# Altium PCB PCB_DACN3_2025-05-22.pcbdoc
Units mm, origin at the board's own origin, x right, y up, seen from the top; angles counter-clockwise.
Board outline 104.52 x 122.3 mm, 2 copper layers (Top Layer, Bottom Layer); 8 components, 29 nets, 64 pads, 0 vias.
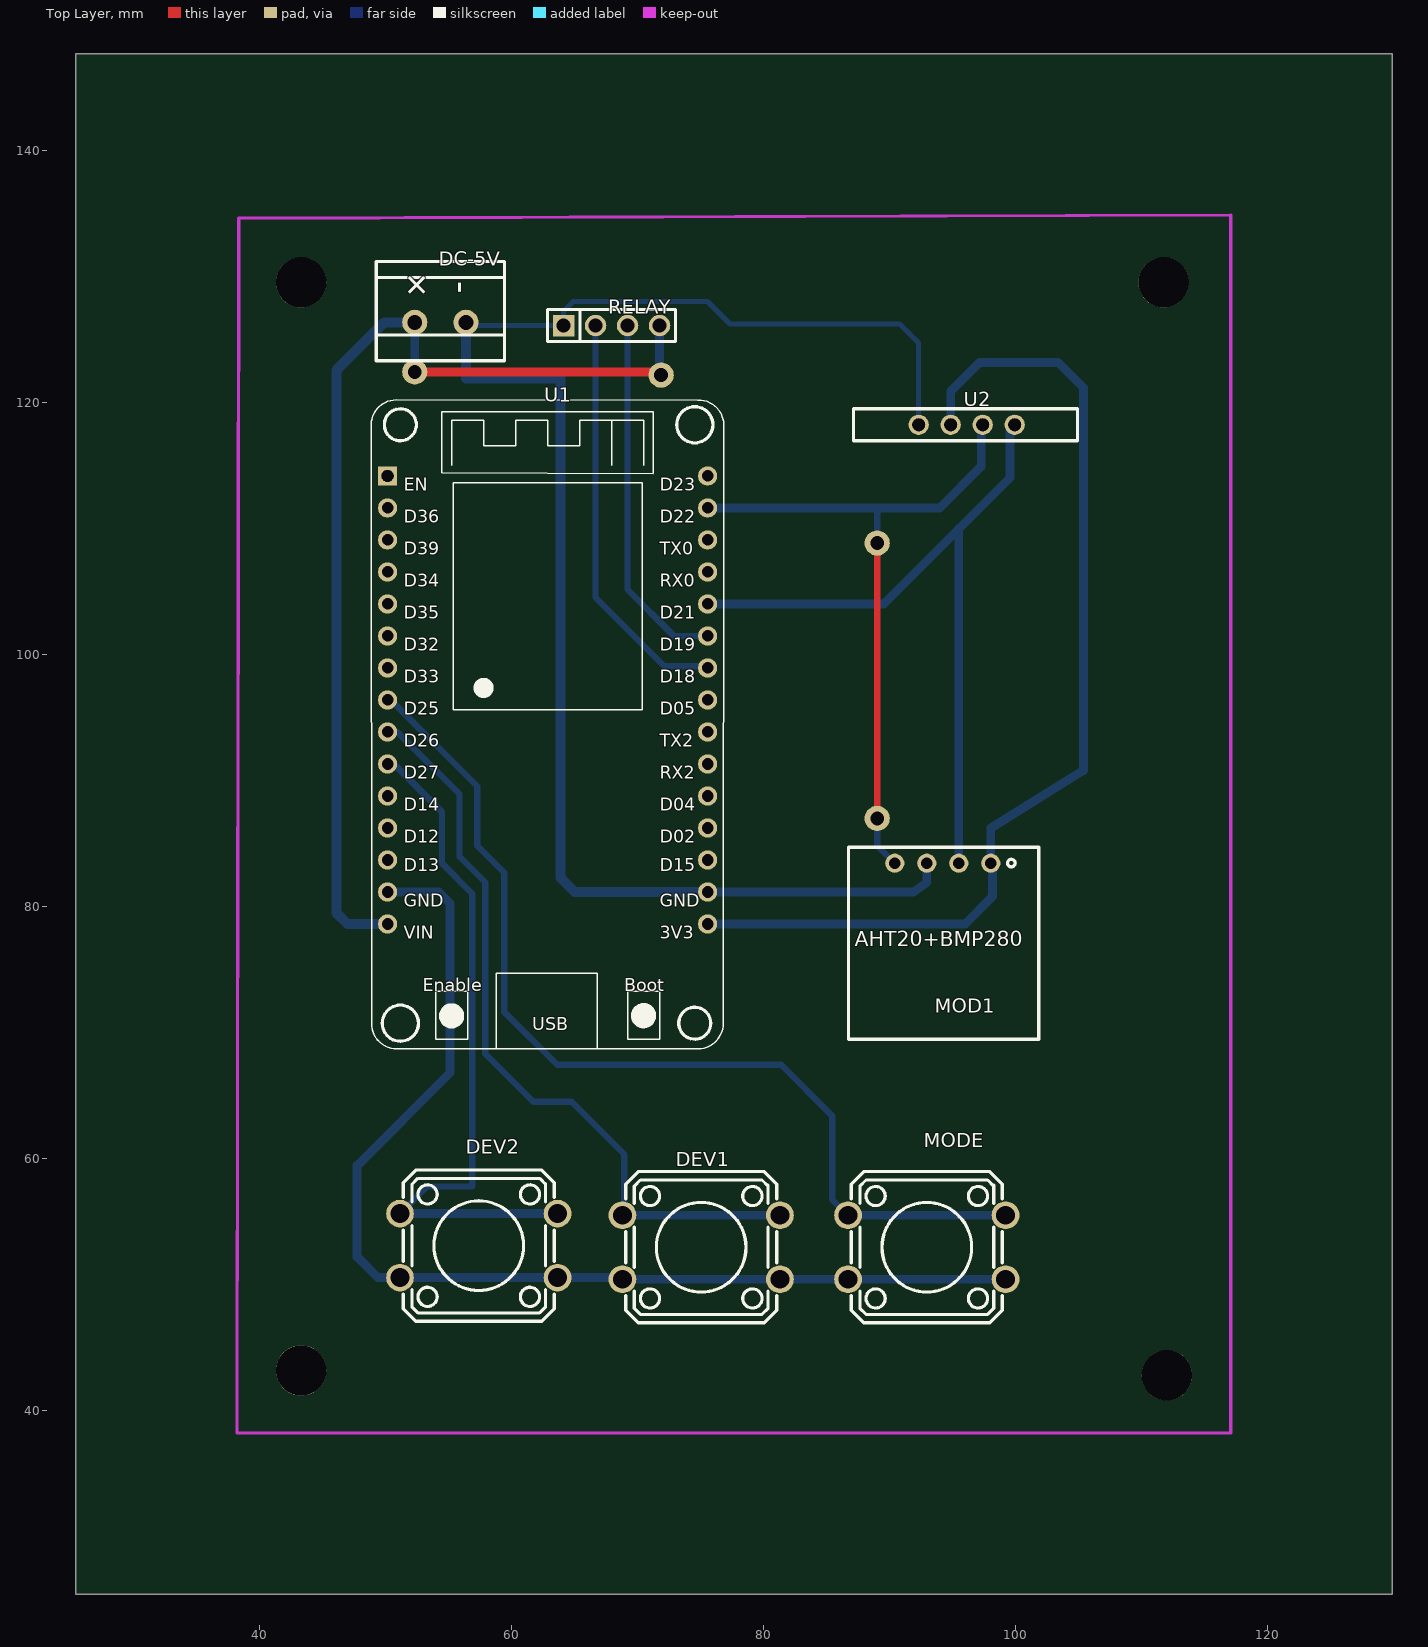
[diagram p0: Top Layer view]
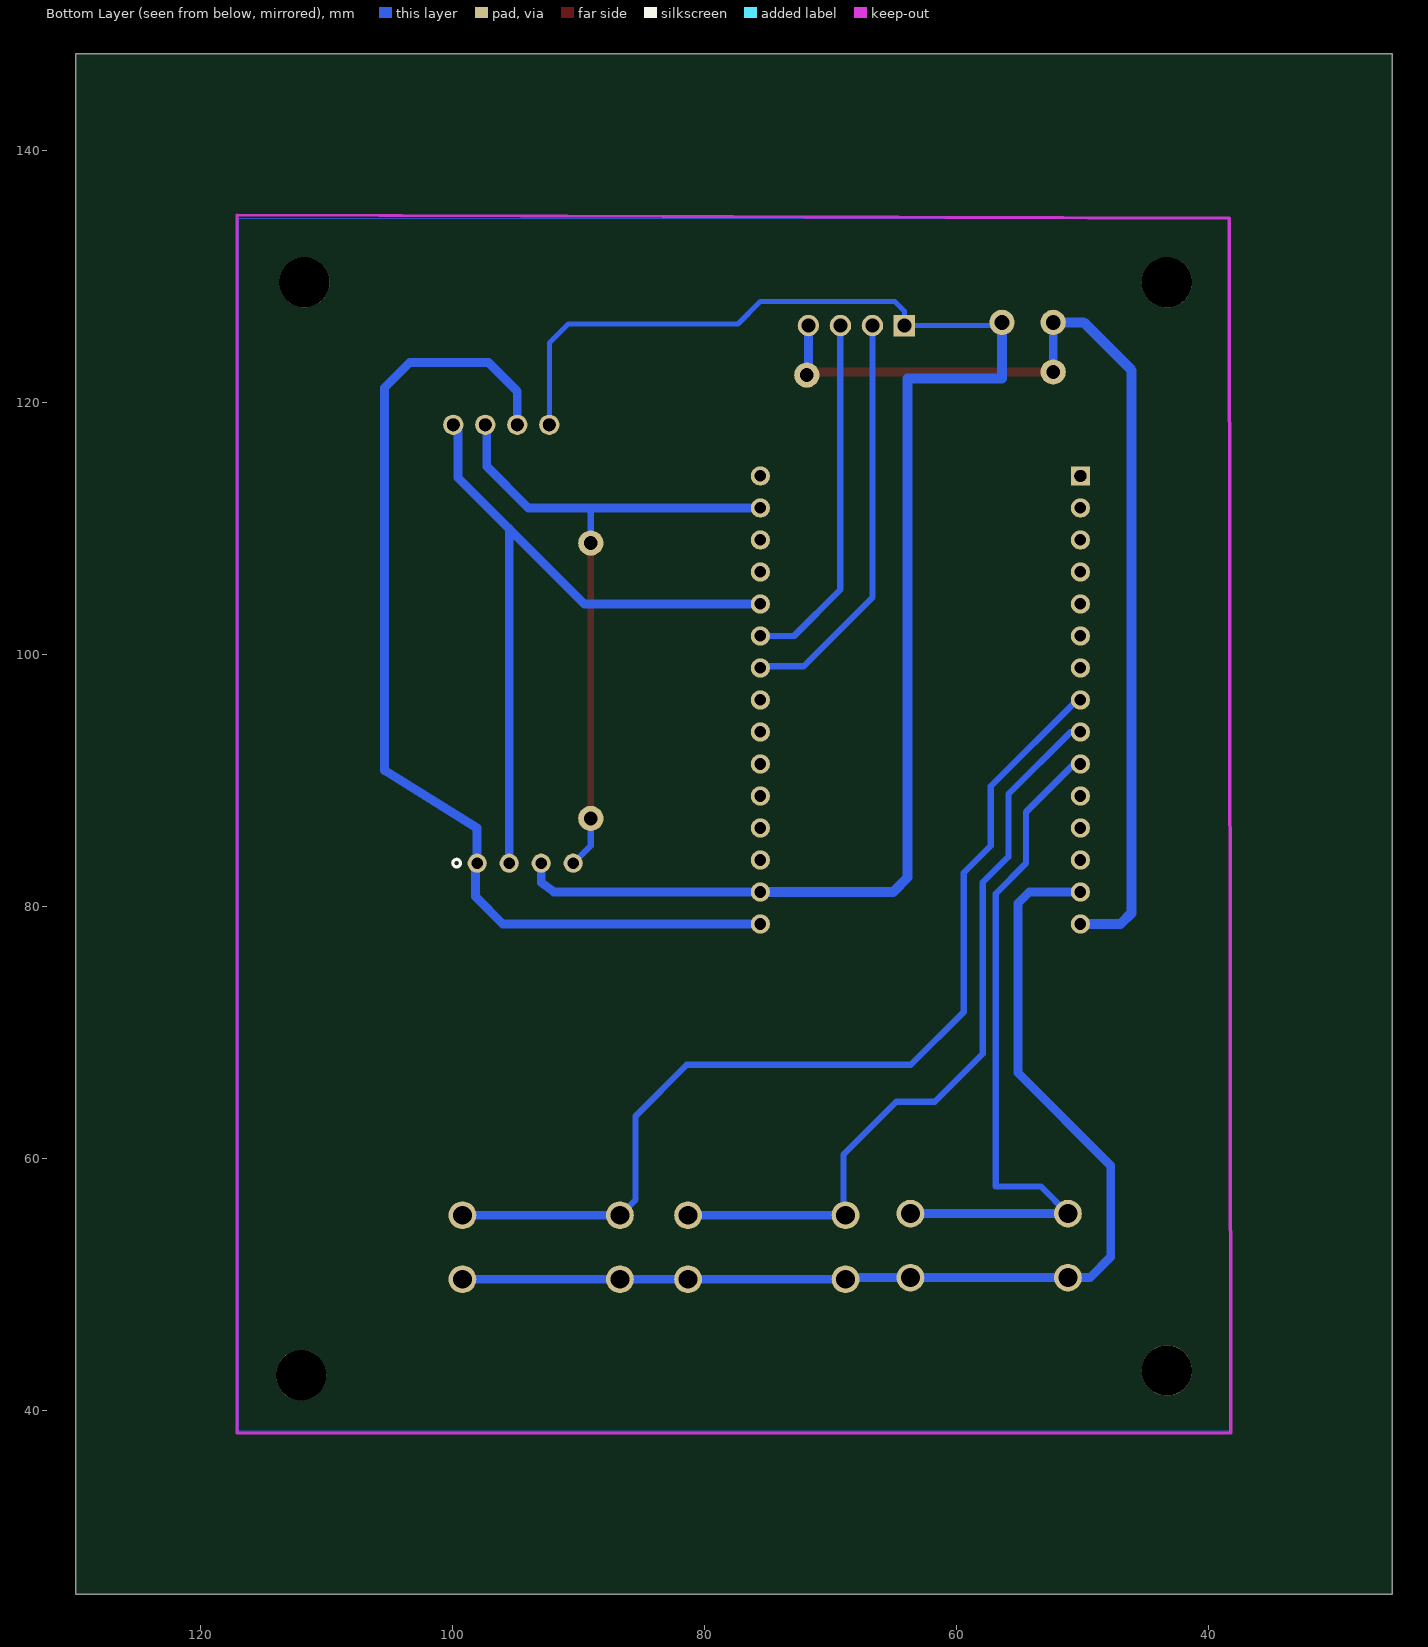
[diagram p1: Bottom Layer view, seen from below]

## Layer stack, top to bottom
Top Layer: signal copper (thickness not stored)
Dielectric: dielectric 0.32, FR-4, Dk 4.8
Bottom Layer: signal copper (thickness not stored)

## Board outline
129.921,25.4 25.4,25.4 25.4,147.701 129.921,147.701

## Components (designator, comment, footprint, x,y, rotation, side; value= is the part's Value field where it differs from the comment)
DC-5V "m02" M02 54.483,127.635 r0 top
DEV1 "dev1" KEY-TH_4P-L12.0-W12.0-P5.00-LS12.5 75.057,52.959 r180 top
DEV2 "dev2" KEY-TH_4P-L12.0-W12.0-P5.00-LS12.5 57.404,53.086 r180 top
MOD1 "AHT20+BMP280" AHT20+BMP280 94.234,78.359 r180 top
MODE "mode" KEY-TH_4P-L12.0-W12.0-P5.00-LS12.5 92.964,52.959 r180 top
RELAY "RELAY" HDR-TH_4P-P2.54-V-M 67.945,126.111 r0 top
U1 "ESP32 DEVKIT V1 DOIT" DOIT-ESP32-DEVKIT-V1 50.165,114.173 r0 top
U2 "0.96 OLED" OLED-TH_OLED0.96-I2C 96.139,118.237 r0 top

## Footprints (in the part's own frame and the unit in brackets; to place one, negate y for a bottom-side part, rotate by r counter-clockwise, add the part's x,y. Pads: shape width x height; smd on the part's side, far side on the other; paste and mask are expansions set on the pad)
AHT20+BMP280 [mil]
  round 60 hole 36 paste+0 mask+2: 1(-150,-200) 2(-50,-200) 3(50,-200) 4(150,-200)
  silkscreen extent -300,-250 295,350
DOIT-ESP32-DEVKIT-V1 [mil]
  rect 60x60 hole 36 slot 37.8 at 0 deg paste+0 mask+4: 1(-0.01,0.01)
  round 60 hole 36 paste+0 mask+4: 2(-0.01,-99.99) 3(-0.01,-199.99) 4(-0.01,-299.99) 5(-0.01,-399.99) 6(-0.01,-499.99) 7(-0.01,-599.99) 8(-0.01,-699.99) 9(-0.01,-799.99) 10(-0.01,-899.99) 11(-0.01,-999.99) 12(-0.01,-1099.99) 13(-0.01,-1199.99) 14(-0.01,-1299.99) 15(-0.01,-1399.99) 16(999.99,0.01) 17(999.99,-99.99) 18(999.99,-199.99) 19(999.99,-299.99) 20(999.99,-399.99) 21(999.99,-499.99) 22(999.99,-599.99) 23(999.99,-699.99) 24(999.99,-799.99) 25(999.99,-899.99) 26(999.99,-999.99) 27(999.99,-1099.99) 28(999.99,-1199.99) 29(999.99,-1299.99) 30(999.99,-1399.99)
  silkscreen extent -50,-1790 1050,238
HDR-TH_4P-P2.54-V-M [mm]
  rect 1.7x1.7 hole 1.1 paste+0 mask+0.051: 1(-3.81,0)
  round 1.7 hole 1.1 paste+0 mask+0.051: 2(-1.27,0) 3(1.27,0) 4(3.81,0)
  silkscreen extent -5.08,-1.27 5.08,1.27
KEY-TH_4P-L12.0-W12.0-P5.00-LS12.5 [mm]
  round 2.2 hole 1.5 paste+0 mask+0.051: 1(-6.251,2.54) 2(6.251,2.54) 3(-6.251,-2.54) 4(6.251,-2.54)
  silkscreen extent -5.99,-6 5.99,6
M02 [mm]
  round 2 hole 1.18 paste+0 mask+0.102: 1(-2.159,-1.27) 2(1.905,-1.27)
  silkscreen extent -5.21,-4.32 4.95,3.56
OLED-TH_OLED0.96-I2C [mm]
  round 1.6 hole 1 slot 1.005 at 0 deg paste+0 mask+0.051: 3(-3.82,0) 4(-1.28,0) 5(1.26,0) 6(3.8,0)
  silkscreen extent -8.99,-1.27 8.79,1.27

## Free pads (board coordinates)
  round 2 hole 1.1 paste+0 mask+0.051: 1(52.324,122.428) 2(71.882,122.174) 3(89.027,108.839) 4(89.027,86.995)
  round 4 hole 4 unplated paste+0: ""(43.307,43.18) ""(43.307,129.54) ""(111.76,129.54) ""(112.014,42.799)

## Nets (pads, with @x,y where several pads share a name; then routed paths per layer and width w, separated by ;. In a path a pad name is that pad's centre, name@x,y a point inside that pad or via, vN(x,y) a via of type N, cw(c..) or ccw(c..) an arc to the next point about the centre after c; other vN are vias at no path point)
3V3: MOD1.1 U1.30 U2.4 | length 83
  Bottom Layer w0.7: U1.30 96.012,78.613 98.171,80.772 98.171,83.312 MOD1.1 98.044,86.233 105.41,90.805 105.41,121.158 103.378,123.19 97.155,123.19 94.859,120.894 U2.4
GND: DC-5V.2 DEV1.1 DEV1.2 DEV2.1 DEV2.2 MOD1.3 MODE.1 MODE.2 RELAY.1 U1.14 U1.29 U2.3 | length 216.9
  Bottom Layer w0.4: DC-5V.2 56.642,126.111 RELAY.1 64.135,127.254 64.897,128.016 75.565,128.016 77.343,126.238 90.805,126.238 92.319,124.724 U2.3
  Bottom Layer w0.7: U1.14 54.229,81.153 55.118,80.264 55.118,66.802 47.752,59.436 47.752,52.197 49.403,50.546 DEV2.2 DEV2.1 68.679,50.546 DEV1.2 DEV1.1 MODE.2 MODE.1 ; U1.29 91.933,81.153 92.964,81.915 MOD1.3
  Bottom Layer w0.8: DC-5V.2 56.388,121.92 63.881,121.92 63.881,82.296 65.024,81.153 U1.29
IO18: RELAY.2 U1.22 | length 32.8
  Bottom Layer w0.5: RELAY.2 66.675,104.521 72.136,99.06 75.438,99.06 U1.22
IO19: RELAY.3 U1.21 | length 28.8
  Bottom Layer w0.5: RELAY.3 69.215,105.156 72.898,101.473 U1.21
IO25: MODE.3 MODE.4 U1.8 | length 79.1
  Bottom Layer w0.5: U1.8 50.419,96.393 57.277,89.535 57.277,84.836 59.436,82.677 59.436,71.628 63.627,67.437 81.407,67.437 85.471,63.373 85.471,56.741 MODE.4
  Bottom Layer w0.7: MODE.4 MODE.3
IO26: DEV1.3 DEV1.4 U1.9 | length 60.9
  Bottom Layer w0.5: U1.9 50.927,93.853 55.88,88.9 55.88,83.947 57.912,81.915 57.912,68.326 61.722,64.516 64.77,64.516 68.961,60.325 68.961,55.654 DEV1.4
  Bottom Layer w0.7: DEV1.4 DEV1.3
IO27: DEV2.3 DEV2.4 U1.10 | length 55.8
  Bottom Layer w0.5: U1.10 50.673,91.313 54.483,87.503 54.483,83.439 56.896,81.026 56.896,57.785 53.312,57.785 DEV2.4
  Bottom Layer w0.7: DEV2.4 DEV2.3
SCL: MOD1.4 pad.3 pad.4 U1.17 U2.5 | length 55.2
  Top Layer w0.5: pad.4 pad.3
  Bottom Layer w0.5: pad.4 89.027,84.836 MOD1.4 ; pad.3 89.027,111.633
  Bottom Layer w0.7: U1.17 93.98,111.633 97.282,114.935 97.282,118.12 U2.5
SDA: MOD1.2 U1.20 U2.6 | length 59.1
  Bottom Layer w0.7: U1.20 89.535,104.013 99.568,114.046 99.568,117.866 U2.6 ; MOD1.2 95.504,110.022
U1_1: U1.1
U1_2: U1.2
U1_3: U1.3
U1_4: U1.4
U1_5: U1.5
U1_6: U1.6
U1_7: U1.7
U1_11: U1.11
U1_12: U1.12
U1_13: U1.13
U1_16: U1.16
U1_18: U1.18
U1_19: U1.19
U1_23: U1.23
U1_24: U1.24
U1_25: U1.25
U1_26: U1.26
U1_27: U1.27
U1_28: U1.28
VIN: DC-5V.1 pad.1 pad.2 RELAY.4 U1.15 | length 82.9
  Top Layer w0.7: pad.1 71.628,122.428 pad.2
  Bottom Layer w0.7: pad.1 DC-5V.1 ; RELAY.4 71.755,122.301 pad.2
  Bottom Layer w0.8: U1.15 46.99,78.613 46.101,79.502 46.101,122.555 49.911,126.365 DC-5V.1

## Polygon pours and split planes (outlines as drawn)
GND on Bottom Layer (solid): 38.354,134.62 38.354,38.354 116.967,38.354 116.967,134.62 38.354,134.62

## Text inside footprints (layer, text, board x,y; h text height)
DC-5V: Top Overlay "-" at 56.642,128.651 h2.03 r90; Top Overlay "+" at 52.28,127.864 h2.03 r45
U1: Top Overlay "Enable" at 52.959,73.287 h1; Top Overlay "Boot" at 68.961,73.287 h1; Top Overlay "USB" at 61.665,70.183 h1; Top Overlay "EN" at 51.435,113.013 h1; Top Overlay "D36" at 51.435,110.473 h1; Top Overlay "D39" at 51.435,107.933 h1; Top Overlay "D34" at 51.435,105.393 h1; Top Overlay "D35" at 51.435,102.853 h1; Top Overlay "D32" at 51.435,100.313 h1; Top Overlay "D33" at 51.435,97.773 h1; Top Overlay "D13" at 51.435,82.787 h1; Top Overlay "D12" at 51.435,85.073 h1; Top Overlay "D14" at 51.435,87.613 h1; Top Overlay "D27" at 51.435,90.153 h1; Top Overlay "D26" at 51.435,92.693 h1; Top Overlay "D25" at 51.435,95.233 h1; Top Overlay "D05" at 71.755,95.233 h1; Top Overlay "TX2" at 71.755,92.693 h1; Top Overlay "RX2" at 71.755,90.153 h1; Top Overlay "D04" at 71.755,87.613 h1; Top Overlay "D02" at 71.755,85.073 h1; Top Overlay "D15" at 71.755,82.787 h1; Top Overlay "D18" at 71.755,97.773 h1; Top Overlay "D19" at 71.755,100.313 h1; Top Overlay "D21" at 71.755,102.853 h1; Top Overlay "RX0" at 71.755,105.393 h1; Top Overlay "TX0" at 71.755,107.933 h1; Top Overlay "D22" at 71.755,110.473 h1; Top Overlay "D23" at 71.755,113.013 h1; Top Overlay "GND" at 71.755,79.993 h1; Top Overlay "3V3" at 71.755,77.453 h1; Top Overlay "VIN" at 51.435,77.453 h1; Top Overlay "GND" at 51.435,79.993 h1
U2: Document "0.96\"" at 91.567,107.315 h2.54